# Altium PCB STM32.PcbDoc
Units mm, origin at the board's own origin, x right, y up, seen from the top; angles counter-clockwise.
Board outline 45 x 45 mm, 2 copper layers (Top Layer, Bottom Layer); 38 components, 25 nets, 182 pads, 26 vias.
Unrouted connection lines stored in the file: 48.
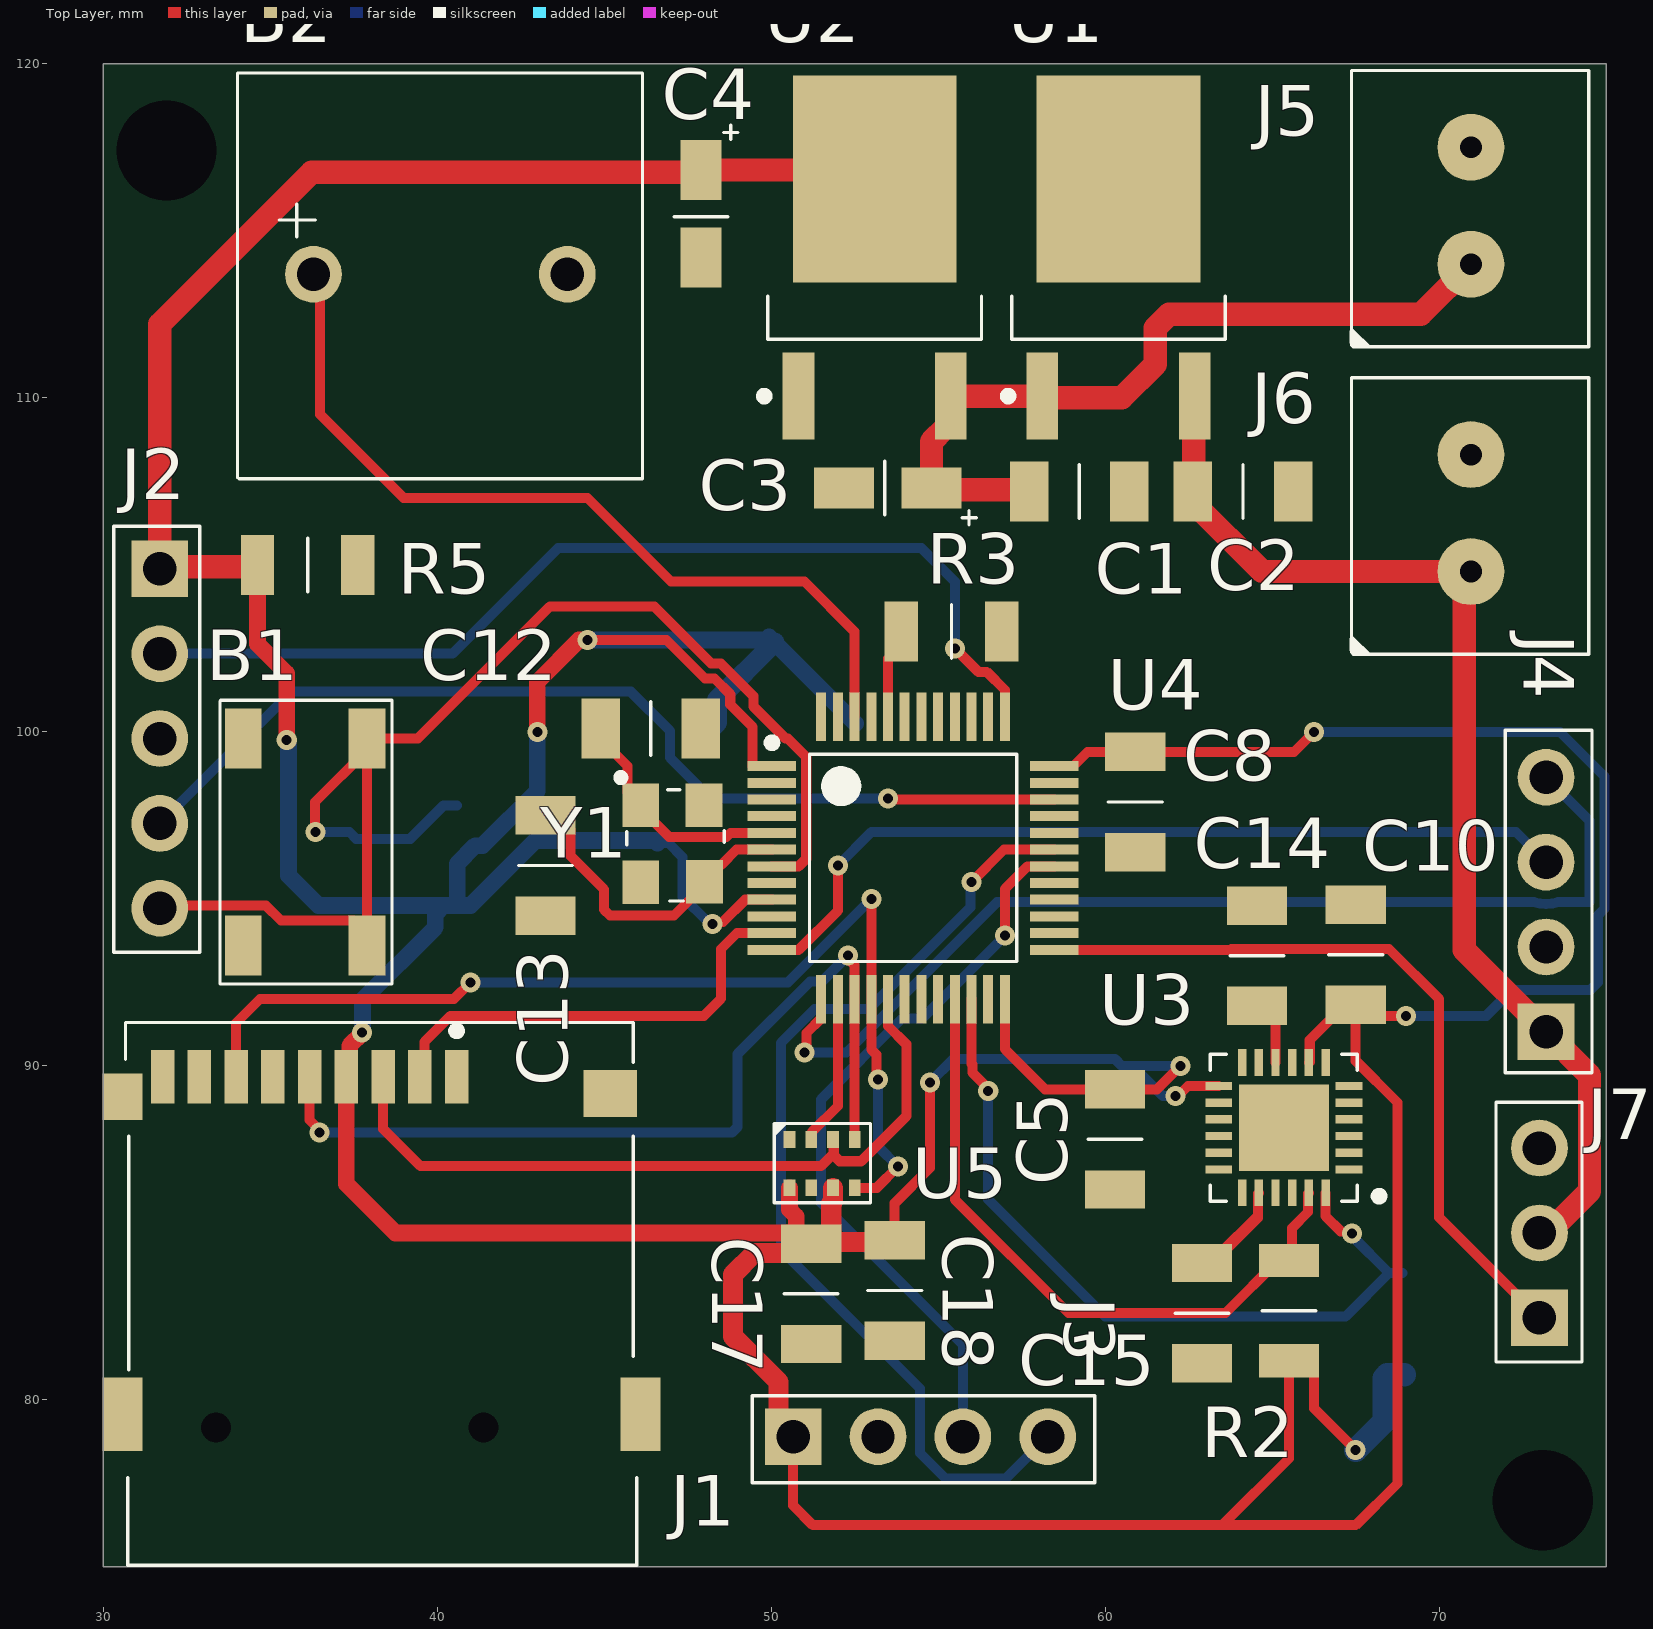
[diagram p0: Top Layer view]
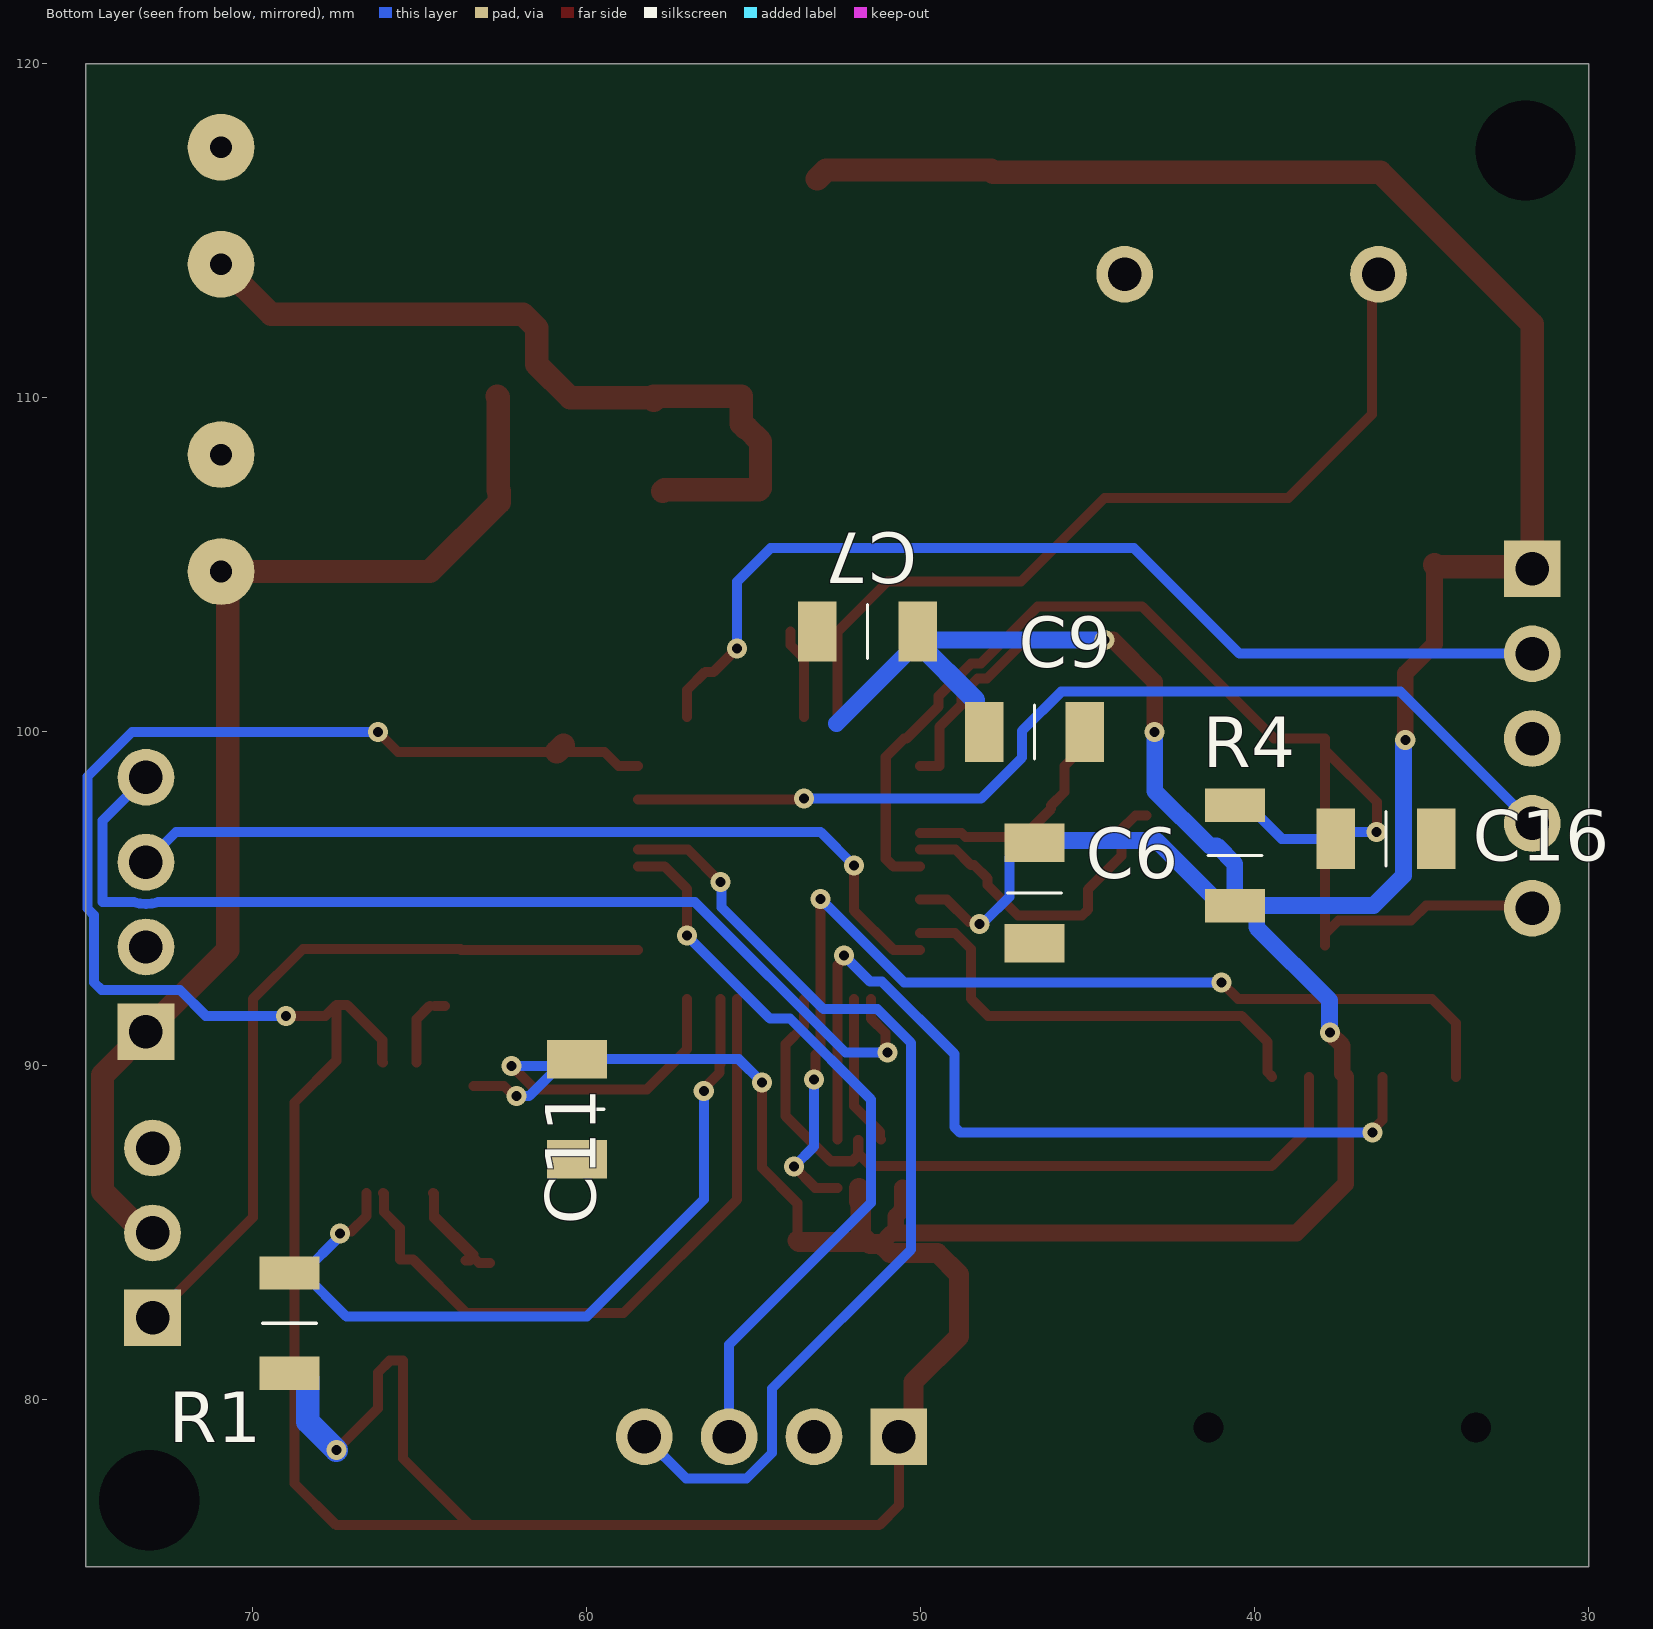
[diagram p1: Bottom Layer view, seen from below]
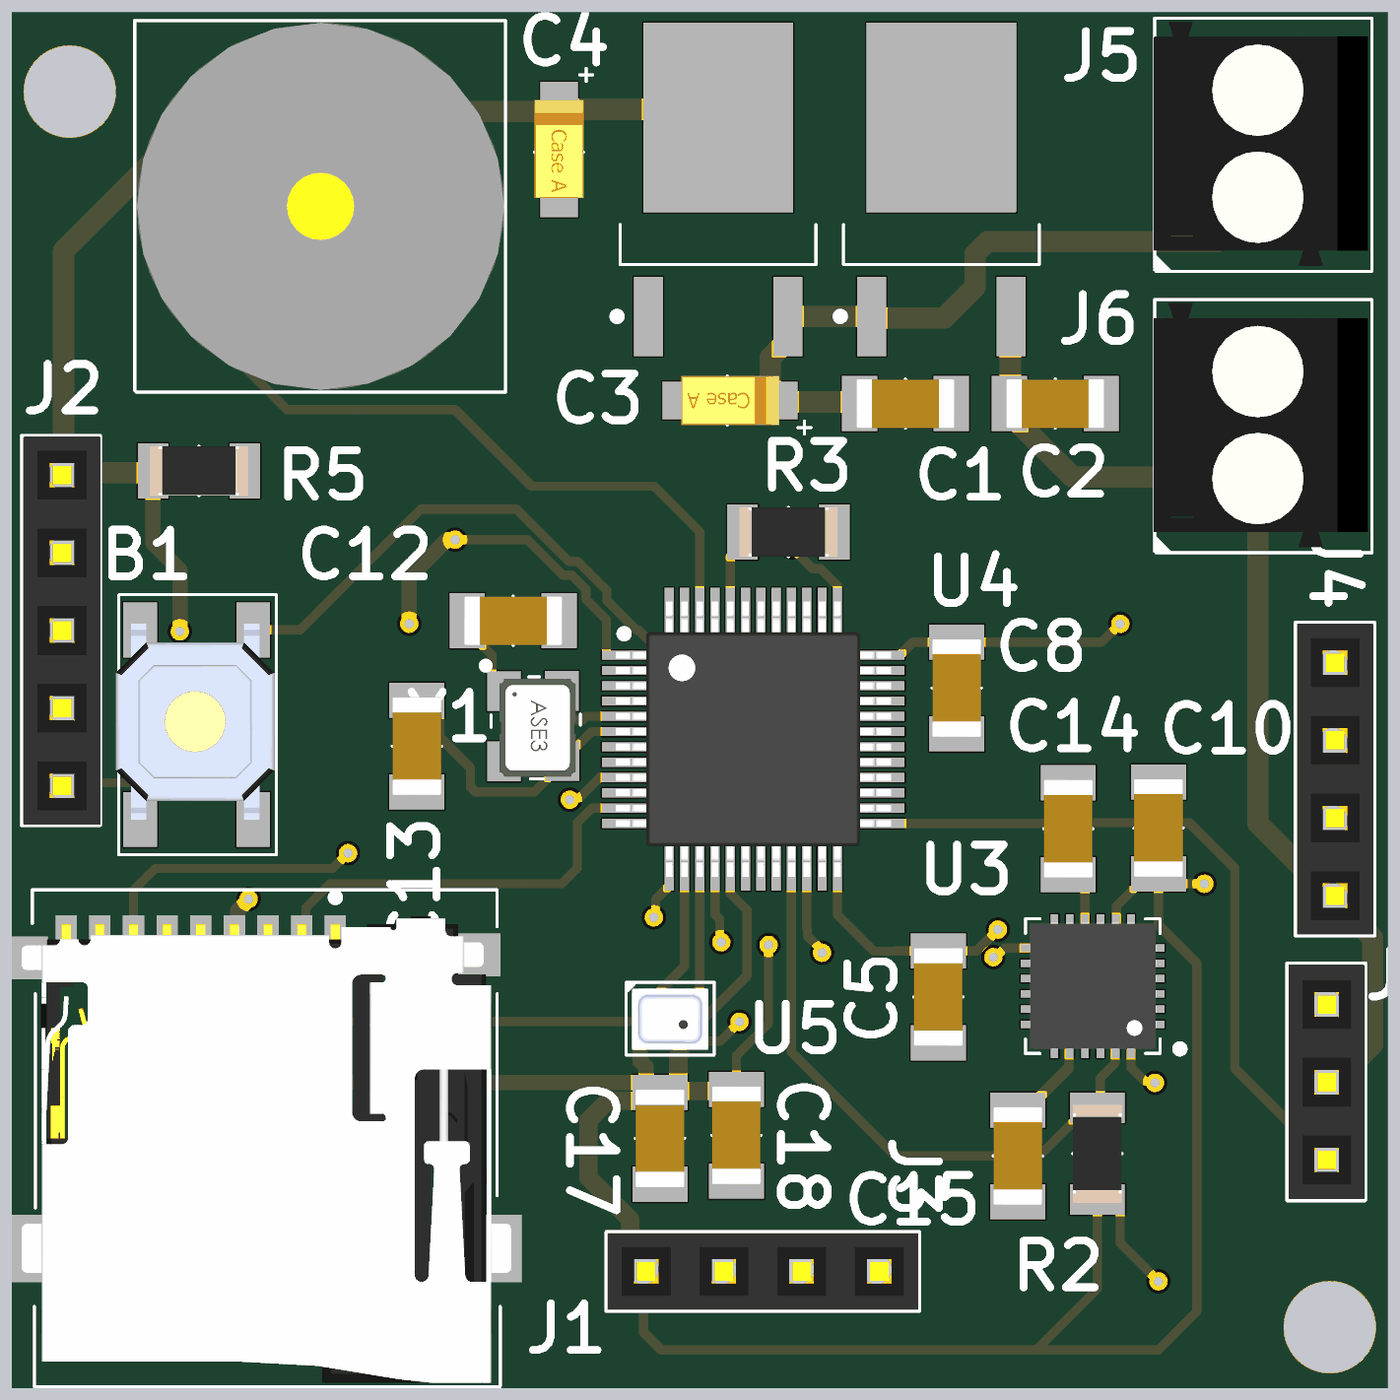
[diagram p2: 3D render of the assembled board from above, using the file's embedded part models]
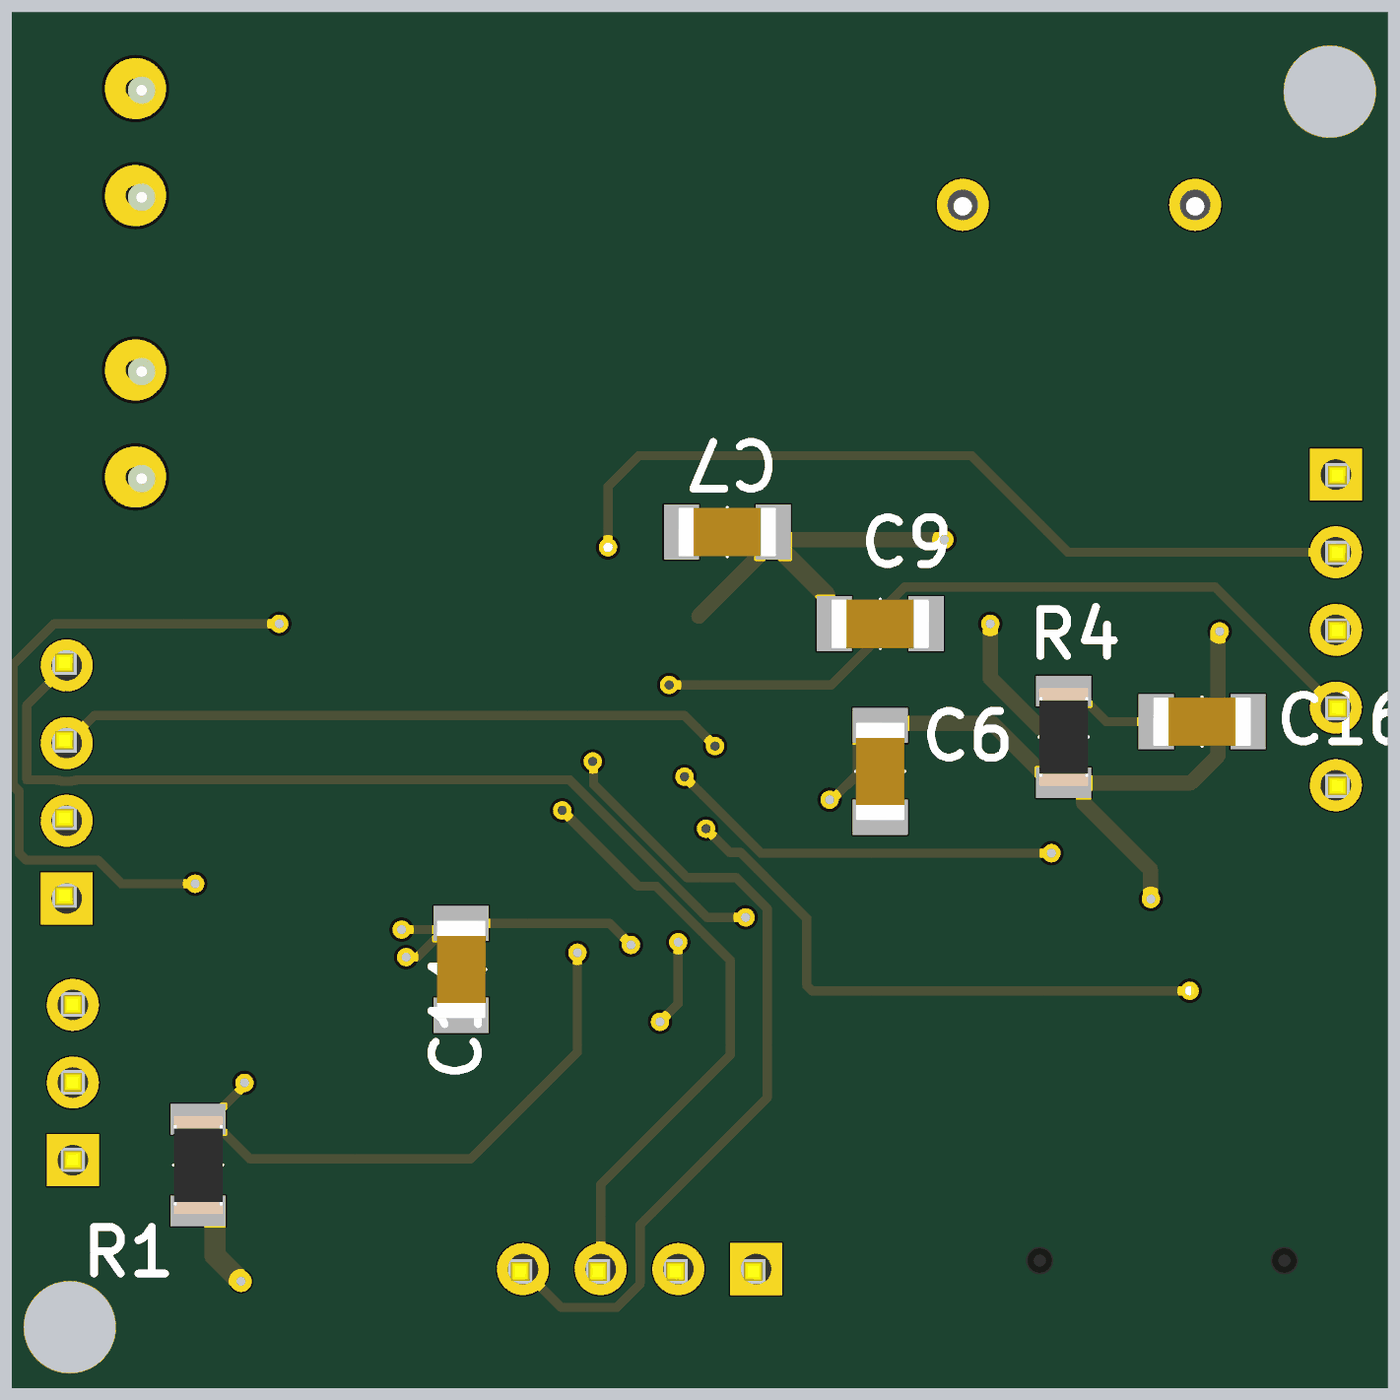
[diagram p3: 3D render of the assembled board from below, using the file's embedded part models]

## Layer stack, top to bottom
Top Solder: solder mask 0.0102, Solder Resist, Dk 3.5
Top Layer: signal copper 0.0356
Dielectric 1: dielectric 0.32, FR-4, Dk 4.8
Bottom Layer: signal copper 0.0356
Bottom Solder: solder mask 0.0102, Solder Resist, Dk 3.5

## Board outline
30,75 30,120 75,120 75,75

## Design rules (kind name [scope] priority, off if disabled: settings)
Clearance [All] p1: gap=0.254 ignorepadtopadclearanceinfootprint=FALSE except(0.152: Arc-Track Arc-SMDPad Arc-Poly Track-Track Track-SMDPad Track-Poly SMDPad-SMDPad SMDPad-THPad SMDPad-Poly THPad-Poly Via-Poly Fill-Poly Poly-Poly)
PolygonConnect [All] p1: connectstyle=Relief reliefconductorwidth=0.254 reliefentries=4 polygonreliefangle="90 Angle" airgapwidth=0.254
RoutingVias [All] p1: holewidth=0.3 width=0.6 viastyle="Through Hole" minholewidth=0.2 minwidth=0.2 maxholewidth=0.9 maxwidth=1.27
SolderMaskExpansion [All] p1: expansion=0.102 istentingtop=FALSE
Width [All] p1: maxlimit=1 minlimit=0.254 preferedwidth=0.3 minimp=50.000000 maximp=50.000000 favimp=50.000000
30 further rules are at their usual default settings.

## Classes and differential pairs
component class STM32: B1 C1 C2 C3 C4 C5 C6 C7 C8 C9 C10 C11 C12 C13 C14 C15 C16 R1 R2 R3 R4 U1 U2 U3 U4 Y1
component class STM32-2: B2 C17 C18 J1 J2 J3 J4 J5 J6 J7 R5 U5

## Components (designator, comment, footprint, x,y, rotation, side; value= is the part's Value field where it differs from the comment)
B1 "Push Button" "PUSB BUTTON-SMD" 37.9,99.8 r270 top
B2 "Buzzer 5v" "Buzzer 5v" 36.3,113.7 r0 top
C1 "330 nF C1206" C1206 59.8,106.7 r180 top
C2 "0.1 uF C1206" C1206 64.7,106.7 r180 top
C3 "10 uF - Tantal" "C1206- TANTAL" 53.4,107.3 r180 top
C4 "10 uF - Tantal" "C1206- TANTAL" 47.9,115.42 r270 top
C5 "0.1 uF C1206" C1206 59.8,87.225 r90 top
C6 "0.1 uF C1206" C1206 47.1,94.6 r90 bottom
C7 "0.1 uF C1206" C1206 52.175,103.5 r180 bottom
C8 "0.1 uF C1206" C1206 60.4,97.325 r90 top
C9 "0.1 uF C1206" C1206 46.025,99.5 r0 bottom
C10 "0.1 uF C1206" C1206 68,93.9 r270 top
C11 "0.1 uF C1206" C1206 60.8,88.125 r90 bottom
C12 "16 pF" C1206 45.825,100.6 r0 top
C13 "16 pF" C1206 43.75,96.575 r270 top
C14 "0.1 uF C1206" C1206 65.05,93.875 r270 top
C15 "2.2 nF c1206" C1206 62.4,82.025 r90 top
C16 "0.1 uF C1206" C1206 35.5,96.3 r0 bottom
C17 "100 nF" C1206 50.7,82.6 r90 top
C18 "100 nF" C1206 53.2,82.7 r90 top
J1 "Micro SD Card Holder" "Micro SD Card Holder" 37.9,82.6 r0 top
J2 "Header 2.54 1x5" "Header 2.54 1x5" 31.7,104.88 r270 top
J3 "Header 2.54 1x4" "Header 2.54 1x4" 51.16,79.625 r0 top
J4 "Header 2.54 1x4" "Header 2.54 1x4" 72.475,91.52 r90 top
J5 "Klemens 1x2 3.5mm" "Klemens 1x2 - 3.5mm" 70.9,115.6 r90 top
J6 "Klemens 1x2 3.5mm" "Klemens 1x2 - 3.5mm" 70.9,106.4 r90 top
J7 "Header 2.54 1x3" "Header 2.54 1x3" 72.975,82.46 r90 top
R1 "4.7K R1206" "R1206 Resıstor" 68.9,82.375 r270 bottom
R2 "4.7K R1206" "R1206 Resıstor" 65.5,82.75 r270 top
R3 "10K R1206" "R1206 Resıstor" 55.325,103 r0 top
R4 "10K R1206" "R1206 Resıstor" 40.6,96.375 r270 bottom
R5 "10K R1206" "R1206 Resıstor" 36.2,105 r180 top
U1 "L7805-DPAK" DPAK228P972X230-3N 60.4,114.2 r90 top
U2 "LD108633 DPAK" DPAK228P972X230-3N 53.1,114.2 r90 top
U3 "MPU6050" QFN50P400X400X90_HS-25N 65.35,88.15 r180 top
U4 "STM32F101" LQFP48-STM 54.25,96.225 r0 top
U5 "BMP280" BMP280 51.525,87.075 r0 top
Y1 "8 MHz 12.5 pf Osc" "8 MHZ Osc." 46.59,96.819 r270 top

## Footprints (in the part's own frame and the unit in brackets; to place one, negate y for a bottom-side part, rotate by r counter-clockwise, add the part's x,y. Pads: shape width x height; smd on the part's side, far side on the other; paste and mask are expansions set on the pad)
"8 MHZ Osc." [mm]
  rect 1.3x1.1 smd mask+0.05: 1(-0.981,-0.49) 2(1.319,-0.49) 3(1.303,1.417) 4(-0.986,1.401)
  silkscreen extent -1.91,-1.19 1.88,2.01, body extent -1.38,-0.64 1.82,1.86, height 1.22
BMP280 [mm]
  rect 0.35x0.5 smd mask+0.05: 1(-0.975,0.725) 2(-0.325,0.725) 3(0.325,0.725) 4(0.975,0.725) 5(0.975,-0.725) 6(0.325,-0.725) 7(-0.325,-0.725) 8(-0.975,-0.725)
  silkscreen extent -1.45,-1.17 1.45,1.2, body extent -1.24,-1 1.26,1, height 0.95
"Buzzer 5v" [mm]
  round 1.7 hole 1 mask+0.05: 1(0,0) 2(7.6,0)
  silkscreen extent -2.27,-6.12 9.85,6.02, body extent -2.2,-6.05 9.8,5.95, height 9.5
C1206 [mm]
  rect 1.15x1.8 smd mask+0.05: 1(-0.925,-0.5) 2(2.075,-0.5)
  silkscreen extent 0.58,-1.3 0.58,0.31, body extent -1.02,-1.3 2.18,0.3, height 1
"C1206- TANTAL" [mm]
  rect 1.8x1.23 smd mask+0.05: 1(-1.4,0) 1(-1.4,0) 2(1.22,0)
  silkscreen extent -2.74,-0.8 0,1.1, body extent -1.7,-0.8 1.5,0.8, height 1.62
DPAK228P972X230-3N [mm] "D-PAK, 3-Pads, Body 6,40x6,56mm (max), IPC Medium Density"
  rect 2.6x0.95 smd mask+0.05: 1(-4.15,2.28) 2(-4.15,-2.28)
  rect 6.2x4.9 smd mask+0.05: 3(2.35,0)
  silkscreen extent -4.27,-3.2 -1.15,3.43, body extent -2.5,-3.2 4.1,3.2, height 2.3
"Header 2.54 1x3" [mm]
  rect 1.7x1.7 hole 1 mask+0.05: 1(0,-0.025)
  round 1.7 hole 1 mask+0.05: 2(2.54,-0.025) 3(5.08,-0.025)
  silkscreen extent -1.33,-1.3 6.45,1.28, body extent -1.26,-1.27 6.36,1.23, height 9.1
"Header 2.54 1x4" [mm]
  rect 1.7x1.7 hole 1 mask+0.05: 1(-0.5,-0.725)
  round 1.7 hole 1 mask+0.05: 2(2.04,-0.725) 3(4.58,-0.725) 4(7.12,-0.725)
  silkscreen extent -1.73,-2.1 8.52,0.5, body extent -1.68,-2.05 8.48,0.45, height 9.1
"Header 2.54 1x5" [mm]
  rect 1.7x1.7 hole 1 mask+0.05: 1(0,0)
  round 1.7 hole 1 mask+0.05: 2(2.54,0) 3(5.08,0) 4(7.62,0) 5(10.16,0)
  silkscreen extent -1.28,-1.37 11.48,1.2, body extent -1.25,-1.3 11.45,1.2, height 9.1
"Klemens 1x2 - 3.5mm" [mm]
  round 2 hole 0.65: 1(-1.6,-0.05) 2(1.9,-0.05)
  silkscreen extent -4.11,-3.58 4.2,3.58, body extent -3.9,-3.45 4.09,3.55, height 8.9
LQFP48-STM [mm] "TSQFP, 48-Leads, Body 7,00x7,00mm, Pitch 0,50mm, IPC Medium Density"
  rect 1.45x0.3 smd mask+0.05: 1(-4.225,2.75) 2(-4.225,2.25) 3(-4.225,1.75) 4(-4.225,1.25) 5(-4.225,0.75) 6(-4.225,0.25) 7(-4.225,-0.25) 8(-4.225,-0.75) 9(-4.225,-1.25) 10(-4.225,-1.75) 11(-4.225,-2.25) 12(-4.225,-2.75) 25(4.225,-2.75) 26(4.225,-2.25) 27(4.225,-1.75) 28(4.225,-1.25) 29(4.225,-0.75) 30(4.225,-0.25) 31(4.225,0.25) 32(4.225,0.75) 33(4.225,1.25) 34(4.225,1.75) 35(4.225,2.25) 36(4.225,2.75)
  rect 0.3x1.45 smd mask+0.05: 13(-2.75,-4.225) 14(-2.25,-4.225) 15(-1.75,-4.225) 16(-1.25,-4.225) 17(-0.75,-4.225) 18(-0.25,-4.225) 19(0.25,-4.225) 20(0.75,-4.225) 21(1.25,-4.225) 22(1.75,-4.225) 23(2.25,-4.225) 24(2.75,-4.225) 37(2.75,4.225) 38(2.25,4.225) 39(1.75,4.225) 40(1.25,4.225) 41(0.75,4.225) 42(0.25,4.225) 43(-0.25,4.225) 44(-0.75,4.225) 45(-1.25,4.225) 46(-1.75,4.225) 47(-2.25,4.225) 48(-2.75,4.225)
  silkscreen extent -4.35,-3.1 3.1,3.57, body extent -4.5,-4.5 4.5,4.5, height 1.6
"Micro SD Card Holder" [mm]
  rect 0.7x1.6 smd paste+0 mask+0: 1(2.684,7.075) 2(1.584,7.075) 3(0.484,7.075) 4(-0.616,7.075) 5(-1.716,7.075) 6(-2.816,7.075) 7(-3.916,7.075) 8(-5.016,7.075) Cd(-6.116,7.075)
  rect 1.2x1.4 smd paste+0 mask+0: 10(-7.316,6.475)
  rect 1.6x1.4 smd paste+0 mask+0: 11(7.284,6.575)
  rect 1.2x2.2 smd paste+0 mask+0: 12(-7.316,-3.025) 13(8.184,-3.025)
  round 0 hole 0.9 unplated paste-1000 mask+0: ""(-4.516,-3.425) ""(3.484,-3.425)
  silkscreen extent -7.22,-7.55 8.08,8.7, body extent -7.57,-7.42 8.43,7.83, height 1.85
"PUSB BUTTON-SMD" [mm]
  rect 1.8x1.1 smd mask+0.05: 1(0,0) 2(6.2,0) 3(0,-3.7) 4(6.2,-3.7)
  silkscreen extent -1.15,-4.4 7.35,0.75, body extent -0.2,-4.5 6.2,0.7, height 1.5
QFN50P400X400X90_HS-25N [mm] "QFN, 24-Leads, Body 4,00x4,00mm, Pitch 0,50mm, Thermal Pad 2,70x2,60mm, IPC Medium Density"
  rect 0.8x0.25 smd mask+0.05: 1(-1.95,1.25) 2(-1.95,0.75) 3(-1.95,0.25) 4(-1.95,-0.25) 5(-1.95,-0.75) 6(-1.95,-1.25) 13(1.95,-1.25) 14(1.95,-0.75) 15(1.95,-0.25) 16(1.95,0.25) 17(1.95,0.75) 18(1.95,1.25)
  rect 0.25x0.8 smd mask+0.05: 7(-1.25,-1.95) 8(-0.75,-1.95) 9(-0.25,-1.95) 10(0.25,-1.95) 11(0.75,-1.95) 12(1.25,-1.95) 19(1.25,1.95) 20(0.75,1.95) 21(0.25,1.95) 22(-0.25,1.95) 23(-0.75,1.95) 24(-1.25,1.95)
  rect 2.7x2.6 smd mask+0.05: 25(0,0)
  silkscreen extent -2.98,-2.2 2.2,2.2, body extent -2.07,-2.07 2.07,2.07, height 0.9
"R1206 Resıstor" [mm]
  rect 1x1.8 smd mask+0.05: 1(-1.425,0) 2(1.575,0)
  silkscreen extent 0.08,-0.8 0.08,0.81, body extent -1.52,-0.8 1.68,0.81, height 0.55

## Part data
B1: "Smd Push Button", Satın Alma Linki=https://urun.n11.com/diger/mini-pushbutton-switch-smd-P227461537?gclid=Cj0KCQjwkoDmBRCcARIsAG3xzl8Y_-jeD7HocNM6lvuZ_rVp83568XPGtNzlPwXWLph8oCRqo0yh87UaApZYEALw_wcB&gclsrc=aw.ds
U1: "L7805 5V REGULATOR. SMD PAKET"
U2: "LD1086 3.3V REGULATOR"
U3: "MPU6050 GYRO"
U4: "STM32F101 48 PİNLİ MİKROİŞLEMCİ"
U5: "BMP280 SENSOR"

## Free pads (board coordinates)
  rect 0x0 hole 3: 4(31.9,117.4) 4(73.1,77)

## Via types
v1: diameter 0.6, hole 0.3, Top Layer to Bottom Layer, 26 vias

## Nets (pads, with @x,y where several pads share a name; then routed paths per layer and width w, separated by ;. In a path a pad name is that pad's centre, name@x,y a point inside that pad or via, vN(x,y) a via of type N, cw(c..) or ccw(c..) an arc to the next point about the centre after c; other vN are vias at no path point)
3.3V: C4.1 C5.2 C6.2 C7.2 C8.2 C9.2 C10.2 C11.2 C17.2 C18.2 J1.4 J2.1 J3.1 R1.2 R2.2 R4.2 R5.2 U2.3 U3.8 U3.13 U4.1 U4.9 U4.24 U4.36 U4.48 U5.6 U5.8 | length 235.3
  Top Layer w0.3: v1(44.5,102.75) 46.865,102.75 48.021,101.594 48.308,101.594 48.777,101.125 48.777,100.817 49.45,100.144 49.45,98.975 U4.1 ; 48.553,94.305 49.223,94.975 U4.9 ; J3.1 50.66,76.84 51.25,76.25 63.5,76.25 ; C18.2 53.7,85.891 54.75,86.941 v1(54.75,89.5) ; U4.24 57,90.5 58.204,89.296 58.877,89.296 58.881,89.3 C5.2 61.55,89.3 v1(62.25,90) ; U4.36 59.05,98.975 59.475,99.4 C8.2@60.575,99.4 ; C8.2 65.65,99.4 v1(66.25,100) ; v1(62.1,89.1) 62.181,89.1 62.481,89.4 U3.13 ; U3.8 66.125,90.125 66.125,90.775 67.175,91.825 C10.2 ; v1(67.5,78.5) 66.25,79.75 66.25,80.825 65.9,81.175 R2.2 65.5,78.25 63.5,76.25 ; v1(69,91.5) 67.825,91.5 C10.2 ; 63.5,76.25 67.5,76.25 68.75,77.5 68.75,88.902 67.5,90.152 C10.2
  Top Layer w0.5: R5.2 34.625,102.626 35.5,101.751 v1(35.5,99.75) ; v1(37.75,91) 37.75,90.973 37.384,90.607 37.384,89.775 J1.4 37.284,86.466 38.75,85 C17.2@50.75,85 ; v1(43,100) 43,101.5 44.25,102.75 v1(44.5,102.75) ; U5.8 50.55,85.7 50.75,85.5 C17.2@50.75,85 ; C17.2 50.875,85 C17.2@50.75,85
  Top Layer w0.6: J3.1 50.219,79.341 50.219,80.541 48.854,81.907 48.854,83.753 49.501,84.4 50.925,84.4 C17.2 51.525,84.675 C17.2@51.575,84.725 ; U5.6 51.85,85.936 51.8,85.886 51.8,84.95 C17.2@51.575,84.725 ; C18.2 53.65,84.725 C17.2@51.575,84.725
  Top Layer w0.7: R5.2 34.565,104.94 31.76,104.94 J2.1 31.7,112.2 36.25,116.75 47.83,116.75 47.9,116.82 52.83,116.82 U2.3 ; C8.2@60.7,99.6 C8.2
  Bottom Layer w0.3: C6.2 46.925,96.675 47.35,96.25 47.35,95.062 47.683,94.729 47.689,94.729 48.171,94.248 v1(48.252,94.248) ; v1(54.75,89.5) 55.45,90.2 C11.2 60.5,90 C11.2@60.825,90 ; v1(62.1,89.1) 61.725,89.1 C11.2@60.825,90 ; v1(62.25,90) C11.2@60.825,90 ; v1(66.25,100) 73.613,100 74.952,98.661 74.952,94.713 74.75,94.511 74.75,92.5 74.524,92.274 72.183,92.274 71.409,91.5 v1(69,91.5)
  Bottom Layer w0.5: v1(35.5,99.75) 35.552,99.698 35.552,95.698 36.45,94.8 R4.2@40.2,94.8 ; v1(37.75,91) 37.769,91.019 37.769,91.969 39.95,94.15 39.95,94.55 R4.2@40.2,94.8 ; v1(43,100) 43,98.231 41.36,96.592 41.142,96.592 40.6,96.05 R4.2 ; v1(44.5,102.75) 48.5,102.75 49.85,102.75 C7.2@49.938,102.838 ; C6.2 46.525,96.75 42.95,96.75 41,94.8 R4.2 ; C7.2@50.1,102.675 52.525,100.25 ; R1.2 R1.2@68.95,80.75 ; R4.2@40.2,94.8 R4.2
  Bottom Layer w0.6: C9.2 48.375,100.275 48.375,100.95 C7.2@50.1,102.675
  Bottom Layer w0.7: v1(67.5,78.5) 68.35,79.35 68.35,80.65 68.45,80.75 R1.2@68.95,80.75
5V: C2.2 J4.1 J6.1 J7.2 U1.2 | length 34.6
  Top Layer w0.7: U1.2 62.653,110.023 62.653,107.228 C2.2 62.625,106.875 64.7,104.8 J6.1 70.75,104.6 70.75,93.47 J4.1 74.5,89.72 74.5,86.25 73.25,85 J7.2
7.4V: C1.2 C3.1 J5.1 U1.1 U2.2 | length 24.1
  Top Layer w0.7: C1.2 57.675,107.25 54.85,107.25 54.8,107.3 54.8,108.69 55.21,109.1 55.255,109.1 55.38,109.225 U2.2 57.995,110.05 57.995,109.925 58.07,110 60.5,110 61.5,111 61.5,112.09 61.91,112.5 69.45,112.5 J5.1 J5.1@70.9,114
GND: B1.3 B1.4 B2.2 C1.1 C2.1 C3.2 C4.2 C5.1 C6.1 C7.1 C8.1 C9.1 C10.1 C11.1 C12.2 C13.2 C14.1 C15.1 C16.1 C17.1 C18.1 J1.6 J1.10 J1.11 J1.12 J1.13 J2.3 J3.2 J4.2 J5.2 J6.2 J7.3 R3.2 R5.1 U1.3 U2.1 U3.1 U3.9 U3.11 U3.18 U4.8 U4.23 U4.35 U4.47 U5.1 U5.7 Y1.2 Y1.4
NetB1_1: B1.1 B1.2 C16.2 J2.5 R4.1 U4.7 | length 41.6
  Top Layer w0.3: J2.5 31.782,94.802 34.875,94.802 35.327,94.35 37.5,94.35 B1.2@37.9,93.95 ; v1(36.356,97) 36.35,97.006 36.35,97.9 B1.1@37.9,99.45 ; B1.2 B1.2@37.9,93.95 ; U4.7 50.827,95.975 51.052,96.2 51.052,99.25 50.506,99.796 50.437,99.796 49.466,100.767 49.466,101.075 48.495,102.046 48.208,102.046 46.504,103.75 43.375,103.75 39.425,99.8 B1.1 B1.1@37.9,99.45 ; B1.2@37.9,93.95 B1.1@37.9,99.45
  Bottom Layer w0.3: v1(36.356,97) 37.375,97 C16.2 39.2,96.8 40.2,97.8 R4.1
NetB2_1: B2.1 U4.46 | length 25.5
  Top Layer w0.3: B2.1 36.5,113.5 36.5,109.5 39,107 44.5,107 47,104.5 51,104.5 52.5,103 U4.46
NetC12_1: C12.1 U4.5 Y1.1 | length 7.2
  Top Layer w0.3: C12.1 44.9,99.775 45.7,98.975 45.7,98.2 Y1.1 46.1,97.7 46.947,96.853 48.666,96.853 48.788,96.975 U4.5
NetC13_1: C13.1 U4.6 Y1.3 | length 9.8
  Top Layer w0.3: C13.1 43.575,97.5 44,97.075 44,96.287 45,95.288 45,94.676 45.176,94.5 47.092,94.5 48.007,95.415 Y1.3 48.007,95.615 48.407,96.015 48.507,96.015 48.967,96.476 U4.6@49.449,96.476 ; U4.6@49.45,96.475 U4.6
NetC14_2: C14.2 U3.10 | length 2.2
  Top Layer w0.3: C14.2@64.25,91.8 C14.2 ; C14.2@64.7,91.8 65.1,91.4 U3.10
NetC15_2: C15.2 U3.20 | length 4.7
  Top Layer w0.3: C15.2 63.225,84.1 64.575,85.45 ; C15.2@63.4,84.35 64.575,85.525 64.575,86.175 U3.20 ; C15.2@63.5,84.175 C15.2@63.625,84.175
NetJ1_2: J1.2 U4.11 | length 13.7
  Top Layer w0.3: J1.2 39.623,89.814 39.623,90.723 40.4,91.5 47.987,91.5 48.5,92.013 48.5,93.5 48.975,93.975 U4.11
NetJ1_3: J1.3 U4.17 U5.3 | length 22.6
  Top Layer w0.3: J1.3 38.384,88.116 39.5,87 51.5,87 51.825,87.325 ; U5.3@51.875,87.775 51.875,87.325 52.054,87.146 52.698,87.146 54.046,88.494 54.046,90.652 53.5,91.198 U4.17
NetJ1_5: J1.5 U4.15 U5.4 | length 26.7
  Top Layer w0.3: J1.5 36.184,88.377 36.48,88.081 v1(36.48,88) ; v1(52.296,93.3) 52.296,93.219 52.5,93.015 U5.4
  Bottom Layer w0.3: v1(36.48,88) 48.824,88 49,88.176 49,90.361 51.162,92.522 51.518,92.522 v1(52.296,93.3)
NetJ1_7: J1.7 U4.16 U5.5 | length 32.1
  Top Layer w0.3: J1.7 33.984,91.284 34.7,92 40.5,92 v1(41,92.5) ; U5.5 53.164,86.35 v1(53.8,86.986) ; v1(53,95) U4.16 53,90.489 53.15,90.339 53.15,89.643 v1(53.204,89.589)
  Bottom Layer w0.3: v1(41,92.5) 50.5,92.5 v1(53,95) ; v1(53.204,89.589) 53.204,87.582 v1(53.8,86.986)
NetJ2_2: J2.2 U4.37 | length 30.3
  Top Layer w0.3: v1(55.5,102.5) 56.202,101.798 56.454,101.798 57,101.252 U4.37
  Bottom Layer w0.3: J2.2 40.459,102.34 43.619,105.5 54.5,105.5 55.5,104.5 v1(55.5,102.5)
NetJ2_4: J2.4 U4.34 | length 30.2
  Top Layer w0.3: v1(53.5,98) 53.525,97.975 U4.34
  Bottom Layer w0.3: J2.4 35.642,101.202 45.8,101.202 46.97,100.032 46.97,99.228 48.198,98 v1(53.5,98)
NetJ3_3: J3.3 U4.30 | length 22.5
  Top Layer w0.3: v1(57,93.9) 57,95.302 57.673,95.975 U4.30
  Bottom Layer w0.3: J3.3 55.74,81.66 51.5,85.9 51.5,89 53.921,91.421 54.521,91.421 v1(57,93.9)
NetJ3_4: J3.4 U4.31 | length 29.7
  Top Layer w0.3: v1(56,95.5) 56.975,96.475 U4.31
  Bottom Layer w0.3: v1(56,95.5) 55.972,95.472 55.972,94.75 52.922,91.7 51.304,91.7 50.296,90.692 50.296,84.497 54.454,80.339 54.454,78.413 55.221,77.646 57.026,77.646 J3.4
NetJ4_3: J4.3 U4.12 | length 25.8
  Top Layer w0.3: U4.12 50.827,93.475 52,94.648 v1(52,96)
  Bottom Layer w0.3: v1(52,96) 53,97 72.3,97 J4.3
NetJ4_4: J4.4 U4.13 | length 31.5
  Top Layer w0.3: v1(51,90.4) 51.057,90.457 51.057,90.982 51.5,91.425 U4.13
  Bottom Layer w0.3: v1(51,90.4) 52.261,90.4 56.761,94.9 72.836,94.9 ccw(c73.2,96.1) 73.564,94.9 74.5,94.9 74.5,97.34 J4.4
NetJ7_1: J7.1 U4.25 | length 23.9
  Top Layer w0.3: U4.25 63.763,93.475 63.788,93.5 68.5,93.5 70,92 70,85.46 J7.1
  Bottom Layer w0.3: J7.1@72.3,83.16 J7.1
NetR1_1: R1.1 U3.24 U4.22 | length 23.6
  Top Layer w0.3: U4.22 56,90.061 56.022,90.039 56.022,89.803 56.5,89.325 v1(56.5,89.244) ; U3.24 66.6,85.5 67.053,85.047
  Bottom Layer w0.3: v1(56.5,89.244) 56.5,86 60,82.5 67.2,82.5 R1.1@68.5,83.8 ; v1(67.385,84.99) 67.385,84.915 R1.1@68.5,83.8 ; R1.1 R1.1@68.5,83.8
NetR2_1: R2.1 U3.23 U4.21 | length 20.4
  Top Layer w0.3: U4.21 55.5,86 58.9,82.6 63.6,82.6 65.2,84.2 65.6,84.2 65.6,85.15 66.075,85.625 66.075,86.175 U3.23
NetR3_1: R3.1 U4.44 | length 2.7
  Top Layer w0.3: U4.44 53.5,102.2 53.9,102.6 R3.1
NetU4_14: U4.14 U5.2 | length 4.5
  Top Layer w0.3: U5.2 51.225,87.825 51.225,88.027 52,88.802 U4.14
pads on no net: J1. J1.1 J1.8 J1.Cd U3.2 U3.3 U3.4 U3.5 U3.6 U3.7 U3.12 U3.14 U3.15 U3.16 U3.17 U3.19 U3.21 U3.22 U3.25 U4.2 U4.3 U4.4 U4.10 U4.18 U4.19 U4.20 U4.26 U4.27 U4.28 U4.29 U4.32 U4.33 U4.38 U4.39 U4.40 U4.41 U4.42 U4.43 U4.45

## Silkscreen, mask and mechanical layers (free items; w line width, h text height)
Mechanical 1:
  the board outline again, w0.1